# Altium PCB sitara_rev3.PcbDoc (part 2 of 3)
Units mil, origin at the board's own origin, x right, y up, seen from the top; angles counter-clockwise.
Board outline 1650 x 2400 mil, 4 copper layers (Top Layer, Internal Plane 1, Internal Plane 2, Bottom Layer), stack 63.387 mil thick; 109 components, 84 nets, 387 pads, 287 vias.
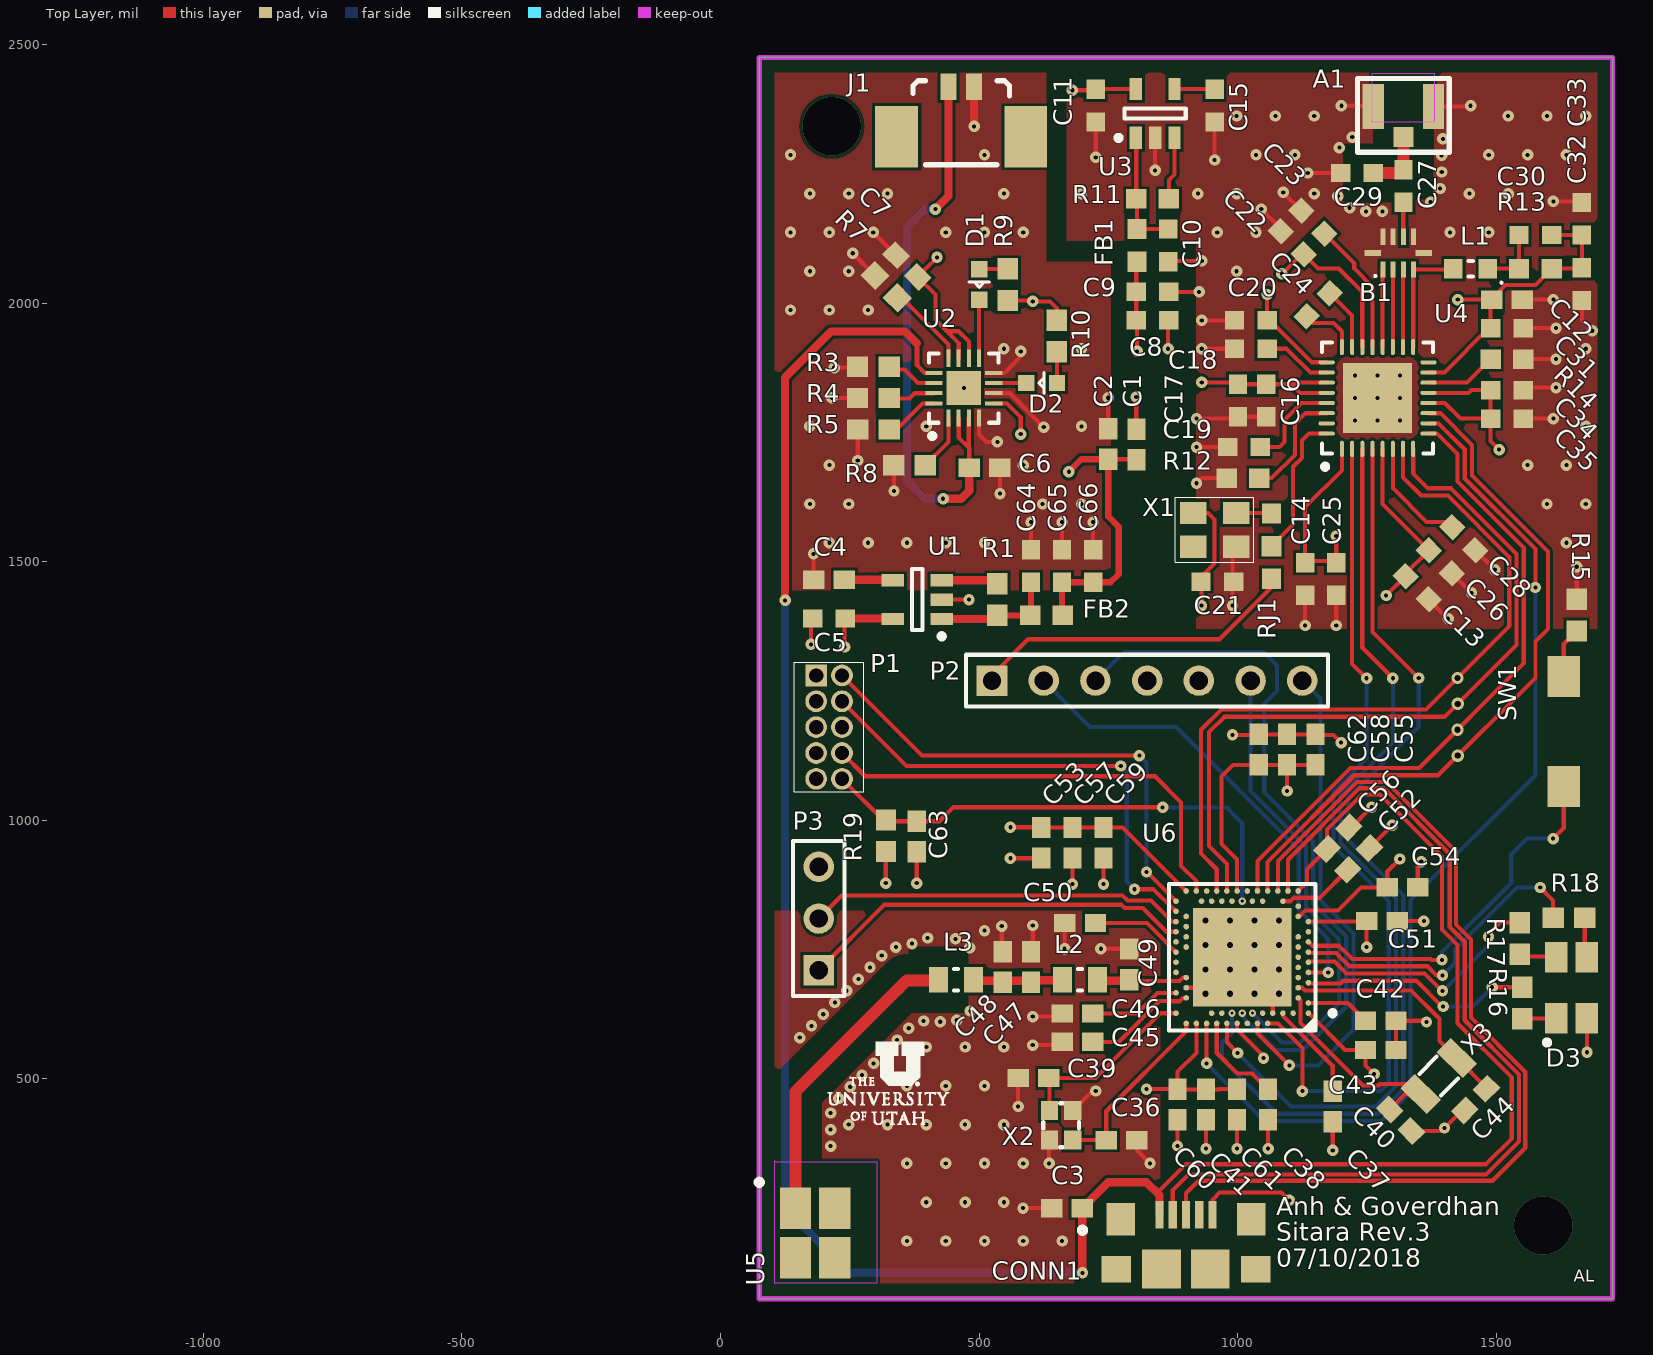
[diagram p0: Top Layer view]

## Part data (continued)
R3: library part ERA-3AEB5622V, "RES SMD 56.2KOHM 0.1% 1/10W 0603", Manufacturer="Panasonic Electronic Components", Operating Temperature="-55°C ~ 155°C", Package / Case="0603 (1608 Metric)", Power (Watts)="0.1W, 1/10W", Resistance (Ohms)=56.2k, Supplier Device Package=0603, Supplier Part Number 1=P56.2KDBTR-ND, Temperature Coefficient=±25ppm/°C, Tolerance=±0.1%, Category=Resistors, ComponentLink1Description=https://industrial.panasonic.com/cdbs/www-data/pdf/RDA0000/AOA0000C237.pdf, ComponentLink1URL=https://industrial.panasonic.com/cdbs/www-data/pdf/RDA0000/AOA0000C237.pdf, Composition="Thin Film", Failure Rate=-, Features="Automotive AEC-Q200", Height - Seated (Max)="0.022\" (0.55mm)", Manufacturer Part Number=ERA-3AEB5622V, Number of Terminations=2, Packaging="Tape & Reel (TR)", Part Status=Active, Pricing 1="5000=0.0354, 10000=0.03304, 25000=0.03139, 50000=0.03075, 125000=0.03009 (USD)", RoHS="RoHS Compliant", Size / Dimension="0.063\" L x 0.031\" W (1.60mm x 0.80mm)", Stock 1=5000, Supplier 1=Digi-Key
R4 R15: library part TNPW06033K57BEEA, "RES SMD 3.57KOHM 0.1% 1/10W 0603", Manufacturer="Vishay Dale", Operating Temperature="-55°C ~ 125°C", Package / Case="0603 (1608 Metric)", Power (Watts)="0.1W, 1/10W", Resistance (Ohms)=3.57k, Supplier Device Package=0603, Supplier Part Number 1=TNPW06033K57BEEA-ND, Temperature Coefficient=±25ppm/°C, Tolerance=±0.1%, Category=Resistors, ComponentLink1Description=http://www.vishay.com/docs/28758/tnpw_e3.pdf, ComponentLink1URL=http://www.vishay.com/docs/28758/tnpw_e3.pdf, Composition="Thin Film", Failure Rate=-, Features="Anti-Sulfur, Automotive AEC-Q200, Moisture Resistant", Height - Seated (Max)="0.022\" (0.55mm)", Manufacturer Part Number=TNPW06033K57BEEA, Number of Terminations=2, Packaging="Tape & Reel (TR)", Part Status=Active, Pricing 1="5000=0.1064 (USD)", RoHS="RoHS Compliant", Size / Dimension="0.063\" L x 0.033\" W (1.60mm x 0.85mm)", Stock 1=0, Supplier 1=Digi-Key
R5: library part ERA-3AEB4321V, "RES SMD 4.32KOHM 0.1% 1/10W 0603", Manufacturer="Panasonic Electronic Components", Operating Temperature="-55°C ~ 155°C", Package / Case="0603 (1608 Metric)", Power (Watts)="0.1W, 1/10W", Resistance (Ohms)=4.32k, Supplier Device Package=0603, Supplier Part Number 1=P4.32KDBTR-ND, Temperature Coefficient=±25ppm/°C, Tolerance=±0.1%, Category=Resistors, ComponentLink1Description=https://industrial.panasonic.com/cdbs/www-data/pdf/RDA0000/AOA0000C237.pdf, ComponentLink1URL=https://industrial.panasonic.com/cdbs/www-data/pdf/RDA0000/AOA0000C237.pdf, Composition="Thin Film", Failure Rate=-, Features="Automotive AEC-Q200", Height - Seated (Max)="0.022\" (0.55mm)", Manufacturer Part Number=ERA-3AEB4321V, Number of Terminations=2, Packaging="Tape & Reel (TR)", Part Status=Active, Pricing 1="5000=0.0354, 10000=0.03304, 25000=0.03139, 50000=0.03075, 125000=0.03009 (USD)", RoHS="RoHS Compliant", Size / Dimension="0.063\" L x 0.031\" W (1.60mm x 0.80mm)", Stock 1=5000, Supplier 1=Digi-Key
R7: library part ERA-3AEB2941V, "RES SMD 2.94KOHM 0.1% 1/10W 0603", Manufacturer="Panasonic Electronic Components", Operating Temperature="-55°C ~ 155°C", Package / Case="0603 (1608 Metric)", Power (Watts)="0.1W, 1/10W", Resistance (Ohms)=2.94k, Supplier Device Package=0603, Supplier Part Number 1=P2.94KDBTR-ND, Temperature Coefficient=±25ppm/°C, Tolerance=±0.1%, Category=Resistors, ComponentLink1Description=https://industrial.panasonic.com/cdbs/www-data/pdf/RDA0000/AOA0000C237.pdf, ComponentLink1URL=https://industrial.panasonic.com/cdbs/www-data/pdf/RDA0000/AOA0000C237.pdf, Composition="Thin Film", Failure Rate=-, Features="Automotive AEC-Q200", Height - Seated (Max)="0.022\" (0.55mm)", Manufacturer Part Number=ERA-3AEB2941V, Number of Terminations=2, Packaging="Tape & Reel (TR)", Part Status=Active, Pricing 1="5000=0.0354, 10000=0.03304, 25000=0.03139, 50000=0.03075, 125000=0.03009 (USD)", RoHS="RoHS Compliant", Size / Dimension="0.063\" L x 0.031\" W (1.60mm x 0.80mm)", Stock 1=10000, Supplier 1=Digi-Key
R8 R19: library part PHT0603Y1002BGT200, "RES SMD 10KOHM 0.1% 0.0375W 0603", Manufacturer="Vishay Sfernice", Operating Temperature="-55°C ~ 215°C", Package / Case="0603 (1608 Metric)", Power (Watts)=0.0375W, Resistance (Ohms)=10k, Supplier Device Package=0603, Supplier Part Number 1=PHTB-10KTR-ND, Temperature Coefficient=±15ppm/°C, Tolerance=±0.1%, Category=Resistors, ComponentLink1Description=http://www.vishay.com/docs/53050/pht.pdf, ComponentLink1URL=http://www.vishay.com/docs/53050/pht.pdf, Composition="Thin Film", Failure Rate=-, Features=Anti-Sulfur, Height - Seated (Max)="0.025\" (0.64mm)", Manufacturer Part Number=PHT0603Y1002BGT200, Number of Terminations=2, Packaging="Tape & Reel (TR)", Part Status=Active, Pricing 1="200=6.6496, 400=6.0262, 600=5.6106, 1000=5.195 (USD)", RoHS="RoHS Compliant", Size / Dimension="0.060\" L x 0.033\" W (1.52mm x 0.85mm)", Stock 1=400, Supplier 1=Digi-Key
R9 R10: library part CRCW06031K50JNEA, "RES SMD 1.5K OHM 5% 1/10W 0603", Manufacturer="Vishay Dale", Operating Temperature="-55°C ~ 155°C", Package / Case="0603 (1608 Metric)", Power (Watts)="0.1W, 1/10W", Resistance (Ohms)=1.5k, Supplier Device Package=0603, Supplier Part Number 1=541-1.5KGTR-ND, Temperature Coefficient=±200ppm/°C, Tolerance=±5%, Category=Resistors, ComponentLink1Description=http://www.vishay.com/docs/20035/dcrcwe3.pdf, ComponentLink1URL=http://www.vishay.com/docs/20035/dcrcwe3.pdf, Composition="Thick Film", Failure Rate=-, Features="Automotive AEC-Q200", Height - Seated (Max)="0.020\" (0.50mm)", Manufacturer Part Number=CRCW06031K50JNEA, Number of Terminations=2, Packaging="Tape & Reel (TR)", Part Status=Active, Pricing 1="5000=0.00266, 10000=0.00231, 25000=0.00203, 50000=0.0019 (USD)", RoHS="RoHS Compliant", Size / Dimension="0.063\" L x 0.033\" W (1.60mm x 0.85mm)", Stock 1=30000, Supplier 1=Digi-Key
R11: "RES 10.0K OHM 1/10W 1% 0603 SMD", Manufacturer=Yageo, Package / Case="0603 (1608 Metric)", Power (Watts)="0.1W, 1/10W", Resistance (Ohms)=10k, Supplier Device Package=0603, Temperature Coefficient=±100ppm/°C, Tolerance=±1%, Category=Resistors, ComponentLink1Description=http://www.yageo.com/documents/recent/PYu-RC0603_51_RoHS_L_4.pdf, ComponentLink1URL=http://www.yageo.com/documents/recent/PYu-RC0603_51_RoHS_L_4.pdf, Composition="Thick Film", Features=-, Height="0.022\" (0.55mm)", Manufacturer Part Number=RC0603FR-0710KL, Number of Terminations=2, Packaging="Tape & Reel (TR)", Pricing 1="5000=0.00171, 10000=0.00149, 25000=0.00131, 50000=0.0012, 125000=0.00117 (USD)", RoHS="RoHS Compliant", Size / Dimension="0.063\" L x 0.031\" W (1.60mm x 0.80mm)", Stock 1=11245000, Supplier 1=Digi-Key
R12: "RES 0.0 OHM 1/10W JUMP 0603 SMD", Manufacturer="Rohm Semiconductor", Package / Case="0603 (1608 Metric)", Power (Watts)="0.1W, 1/10W", Resistance (Ohms)=0.0, Temperature Coefficient=-, Tolerance=Jumper, Category=Resistors, ComponentLink1Description=http://rohmfs.rohm.com/en/products/databook/datasheet/passive/resistor/chip_resistor/mcr_g.pdf, ComponentLink1URL=http://rohmfs.rohm.com/en/products/databook/datasheet/passive/resistor/chip_resistor/mcr_g.pdf, Composition="Thick Film", Features=-, Height="0.022\" (0.55mm)", Manufacturer Part Number=MCR03ERTJ000, Number of Terminations=2, Packaging="Cut Tape (CT)", Pricing 1="1=0.1, 25=0.0064, 100=0.0035, 250=0.00268, 500=0.00214, 1000=0.00157 (USD)", RoHS="RoHS Compliant", Size / Dimension="0.063\" L x 0.031\" W (1.60mm x 0.80mm)", Stock 1=127296, Supplier 1=Digi-Key, Supplier Device Package="0603 (1608 Metric)"
R13: "RES SMD 10 OHM 1% 1/10W 0603", Manufacturer=Yageo, Operating Temperature="-55°C ~ 155°C", Package / Case="0603 (1608 Metric)", Power (Watts)="0.1W, 1/10W", Resistance (Ohms)=10, Supplier Device Package=0603, Supplier Part Number 1=311-10.0HRCT-ND, Temperature Coefficient=±200ppm/°C, Tolerance=±1%, Category=Resistors, ComponentLink1Description=http://www.yageo.com/NewPortal/yageodocoutput?fileName=/pdf/R-Chip/PYu-RC_Group_51_RoHS_L_3.pdf, ComponentLink1URL=http://www.yageo.com/NewPortal/yageodocoutput?fileName=/pdf/R-Chip/PYu-RC_Group_51_RoHS_L_3.pdf, Composition="Thick Film", Features="Moisture Resistant", Height="0.022\" (0.55mm)", Manufacturer Part Number=RC0603FR-0710RL, Number of Terminations=2, Packaging="Cut Tape (CT)", Pricing 1="1=0.1, 10=0.014, 25=0.01, 100=0.0057, 250=0.00436, 500=0.00348, 1000=0.00257, 2500=0.00223 (USD)", RoHS="RoHS Compliant", Size / Dimension="0.063\" L x 0.031\" W (1.60mm x 0.80mm)", Stock 1=1047153, Supplier 1=Digi-Key
R14: "RES 56K OHM 1/10W 5% 0603 SMD", Manufacturer="Rohm Semiconductor", Package / Case="0603 (1608 Metric)", Power (Watts)="0.1W, 1/10W", Resistance (Ohms)=56k, Temperature Coefficient=±200ppm/°C, Tolerance=±5%, Category=Resistors, ComponentLink1Description=http://rohmfs.rohm.com/en/products/databook/datasheet/passive/resistor/chip_resistor/mcr_g.pdf, ComponentLink1URL=http://rohmfs.rohm.com/en/products/databook/datasheet/passive/resistor/chip_resistor/mcr_g.pdf, Composition="Thick Film", Features=-, Height="0.022\" (0.55mm)", Manufacturer Part Number=MCR03ERTJ563, Number of Terminations=2, Packaging="Tape & Reel (TR)", Pricing 1="5000=0.00184, 10000=0.0016, 25000=0.00144, 50000=0.00128, 125000=0.00106 (USD)", RoHS="RoHS Compliant", Size / Dimension="0.063\" L x 0.031\" W (1.60mm x 0.80mm)", Stock 1=5000, Supplier 1=Digi-Key, Supplier Device Package="0603 (1608 Metric)"
R16 R17 R18: library part RC0603JR-07330RL, "RES SMD 330 OHM 5% 1/10W 0603", Manufacturer=Yageo, Operating Temperature="-55°C ~ 155°C", Package / Case="0603 (1608 Metric)", Power (Watts)="0.1W, 1/10W", Supplier Device Package=0603, Supplier Part Number 1=311-330GRTR-ND, Temperature Coefficient=±100ppm/°C, Tolerance=±5%, Category=Resistors, ComponentLink1Description=http://www.yageo.com/documents/recent/PYu-RC_Group_51_RoHS_L_6.pdf, ComponentLink1URL=http://www.yageo.com/documents/recent/PYu-RC_Group_51_RoHS_L_6.pdf, Composition="Thick Film", Failure Rate=-, Features="Moisture Resistant", Height - Seated (Max)="0.022\" (0.55mm)", Manufacturer Part Number=RC0603JR-07330RL, Number of Terminations=2, Packaging="Tape & Reel (TR)", Part Status=Active, Pricing 1="5000=0.00129, 10000=0.00112, 25000=0.00099, 50000=0.0009, 125000=0.00089 (USD)", Resistance (Ohms)=330, RoHS="RoHS Compliant", Size / Dimension="0.063\" L x 0.031\" W (1.60mm x 0.80mm)", Stock 1=1380000, Supplier 1=Digi-Key
RJ1: "Resistor Jumper", Package / Case="0603 (1608 Metric)", Applications="General Purpose", Mounting Type="Surface Mount, MLCC"
SW1: "SWITCH TACTILE SPST-NO 0.05A 12V", Contact Rating @ Voltage="0.05A @ 12VDC", Illumination Type, Color=-, Manufacturer="Panasonic Electronic Components", Operating Force=100gf, Operating Temperature="-30°C ~ 85°C", Actuator Height off PCB, from Pins=5.00mm, Actuator Material=-, Actuator Orientation="Top Actuated", Actuator Type=Standard, Category=Switches, Circuit=SPST-NO, ComponentLink1Description=http://www.panasonic.com/industrial/components/pdf/ATK0000CE7.pdf, ComponentLink1URL=http://www.panasonic.com/industrial/components/pdf/ATK0000CE7.pdf, Features=-, Illumination=Non-Illuminated, Illumination Voltage (Nominal)=-, Ingress Protection=-, Manufacturer Part Number=EVQ-PE105K, Mechanical Life="50,000 Cycles", Mounting Type="Surface Mount", Outline="6.00mm x 3.50mm", Packaging="Tape & Reel (TR)", Pricing 1="2000=0.32832, 4000=0.3078, 6000=0.29754, 10000=0.27702, 14000=0.27292, 50000=0.26676 (USD)", RoHS="RoHS Compliant", Stock 1=18000, Supplier 1=Digi-Key, Switch Function=Off-Mom, Switch Travel=0.25mm, Termination Style="Gull Wing"
U1: library part FAN2500S30X, "IC REG LDO 3V 0.1A SOT23-5", Current - Limit (Min)=-, Current - Output=100mA, Manufacturer="Fairchild Semiconductor", Operating Temperature="-40°C ~ 125°C", Package / Case="SC-74A, SOT-753", Supplier Device Package=SOT-23-5, Voltage - Dropout (Typical)="0.1V @ 100mA", Voltage - Input="Up to 6.5V", Voltage - Output=3V, Category="Integrated Circuits (ICs)", ComponentLink1Description=http://www.fairchildsemi.com/ds/FA/FAN2500.pdf, ComponentLink1URL=http://www.fairchildsemi.com/ds/FA/FAN2500.pdf, Manufacturer Part Number=FAN2500S30X, Mounting Type="Surface Mount", Number of Regulators=1, Packaging="Tape & Reel (TR)", Pricing 1="3000=0.25462, 6000=0.23706, 15000=0.22828, 30000=0.2195, 75000=0.21599, 150000=0.21072 (USD)", Regulator Topology="Positive Fixed", RoHS="RoHS Compliant", Stock 1=6000, Supplier 1=Digi-Key
U2: "IC LI-ION CHARGE PWR MGMT 16VQFN", Battery Pack Voltage=4.2V, Charge Current - Max=500mA, Current - Charging="Constant - Programmable", Manufacturer="Texas Instruments", Operating Temperature="-5°C ~ 125°C (TJ)", Package / Case="16-VFQFN Exposed Pad", Supplier Device Package="16-QFN (3x3)", Supplier Part Number 1=296-44194-2-ND, Voltage - Supply (Max)=10.2V, Battery Chemistry=Lithium-Ion, Category="Integrated Circuits (ICs)", ComponentLink1Description=http://www.ti.com/lit/ds/symlink/bq24232ha.pdf, ComponentLink1URL=http://www.ti.com/lit/ds/symlink/bq24232ha.pdf, Fault Protection="Over Temperature, Over Voltage, Reverse Current, Short Circuit", Interface=USB, Manufacturer Part Number=BQ24232HARGTT, Number of Cells=1, Packaging="Tape & Reel (TR)", Part Status=Active, Pricing 1="250=2.09792, 500=1.88244, 1250=1.5876 (USD)", Programmable Features="Current, Timer", RoHS="RoHS Compliant", Stock 1=0, Supplier 1=Digi-Key
U3: "IC REG LDO 3V 0.1A SOT23-5", Current - Limit (Min)=-, Current - Output=100mA, Manufacturer="Fairchild Semiconductor", Operating Temperature="-40°C ~ 125°C", Package / Case="SC-74A, SOT-753", Supplier Device Package=SOT-23-5, Voltage - Dropout (Typical)="0.1V @ 100mA", Voltage - Input="Up to 6.5V", Voltage - Output=3V, Category="Integrated Circuits (ICs)", ComponentLink1Description=http://www.fairchildsemi.com/ds/FA/FAN2500.pdf, ComponentLink1URL=http://www.fairchildsemi.com/ds/FA/FAN2500.pdf, Manufacturer Part Number=FAN2500S30X, Mounting Type="Surface Mount", Number of Regulators=1, Packaging="Tape & Reel (TR)", Pricing 1="3000=0.25462, 6000=0.23706, 15000=0.22828, 30000=0.2195, 75000=0.21599, 150000=0.21072 (USD)", Regulator Topology="Positive Fixed", RoHS="RoHS Compliant", Stock 1=6000, Supplier 1=Digi-Key
U4: "IC RF TXRX SNGL-CHIP LP 32-QFN", Current - Receiving=19mA, Current - Transmitting=54mA, Frequency="164MHz ~ 190MHz, 410MHz ~ 475MHz, 820MHz ~ 950MHz", Manufacturer="Texas Instruments", Operating Temperature="-40°C ~ 85°C", Package / Case="32-VFQFN Exposed Pad", Power - Output=16dBm, Voltage - Supply="2 V ~ 3.6 V", Antenna Connector="PCB, Surface Mount", Applications="General Purpose", Category="RF/IF and RFID", ComponentLink1Description=http://www.ti.com/lit/ds/symlink/cc1200.pdf, ComponentLink1URL=http://www.ti.com/lit/ds/symlink/cc1200.pdf, Data Interface="PCB, Surface Mount", Data Rate (Max)=1.25Mbps, Manufacturer Part Number=CC1200RHBR, Memory Size=-, Modulation or Protocol="FSK, GFSK, MSK, OOK", Packaging="Tape & Reel (TR)", Pricing 1="3000=2.926 (USD)", RoHS="RoHS Compliant", Sensitivity=-125dBm, Stock 1=0, Supplier 1=Digi-Key
U5: library part 0479480001, "ANTENNA 2.4GHZ 50 OHMS SMD", Frequency Group="UHF (2 GHz ~ 3 GHz)", Frequency Range="2.4GHz ~ 2.483.5GHz", Manufacturer="Molex, LLC", Power - Max=2W, Supplier Part Number 1=WM4893TR-ND, Antenna Type=Chip, Applications="Bluetooth, WLAN, Zigbee™", Category="RF/IF and RFID", ComponentLink1Description=http://www.molex.com/pdm_docs/sd/479480001_sd.pdf, ComponentLink1URL=http://www.molex.com/pdm_docs/sd/479480001_sd.pdf, Features=-, Frequency (Center/Band)=2.4GHz, Gain=3dBi, Height (Max)="0.157\" (4.00mm)", Ingress Protection=-, Manufacturer Part Number=0479480001, Mounting Type="Surface Mount", Number of Bands=1, Packaging="Tape & Reel (TR)", Part Status=Active, Pricing 1="1800=0.73695, 3600=0.68782, 5400=0.65343, 12600=0.62886, 45000=0.60921, 90000=0.58956 (USD)", Return Loss=-9dB, RoHS="RoHS Compliant", Stock 1=3600, Supplier 1=Digi-Key, Termination=Solder, VSWR=-
U6: library part nRF52840_QIAA, "Multi-protocol Bluetooth Low Energy, IEEE 802.15.4, ANT and 2.4GHz proprietary system-on-chip", Part Number=nRF52840-QIAAAA, Footprint Doc=AQFN-73, LatestRevisionDate=2016-11-22, Pin Count=73, Published=2016-06-22, Publisher="Nordic Semiconductor"
X1: "OSC XO 40.0000MHZ LVCMOS SMD", Current - Supply (Disable) (Max)=10µA, Current - Supply (Max)=13mA, Frequency=40MHz, Frequency Stability=±50ppm, Manufacturer="Abracon LLC", Operating Temperature="-40°C ~ 85°C", Package / Case="4-SMD, No Lead (DFN, LCC)", Ratings=-, Supplier Part Number 1=535-13489-1-ND, Voltage - Supply=3.3V, Category="Crystals, Oscillators, Resonators", ComponentLink1Description=http://www.abracon.com/Oscillators/ASEseries.pdf, ComponentLink1URL=http://www.abracon.com/Oscillators/ASEseries.pdf, Function=Enable/Disable, Height - Seated (Max)="0.047\" (1.20mm)", Manufacturer Part Number=ASE-40.000MHZ-L-C-T, Mounting Type="Surface Mount", Output=CMOS, Packaging="Cut Tape (CT)", Part Status=Active, Pricing 1="1=1.26, 10=1.209, 50=1.1804, 100=1.0118, 500=0.98368 (USD)", RoHS="RoHS Compliant", Size / Dimension="0.126\" L x 0.098\" W (3.20mm x 2.50mm)", Stock 1=2000, Supplier 1=Digi-Key, Type="XO (Standard)"